# EAGLE board 3x (EAGLE 6.5.0), part 1 of 2
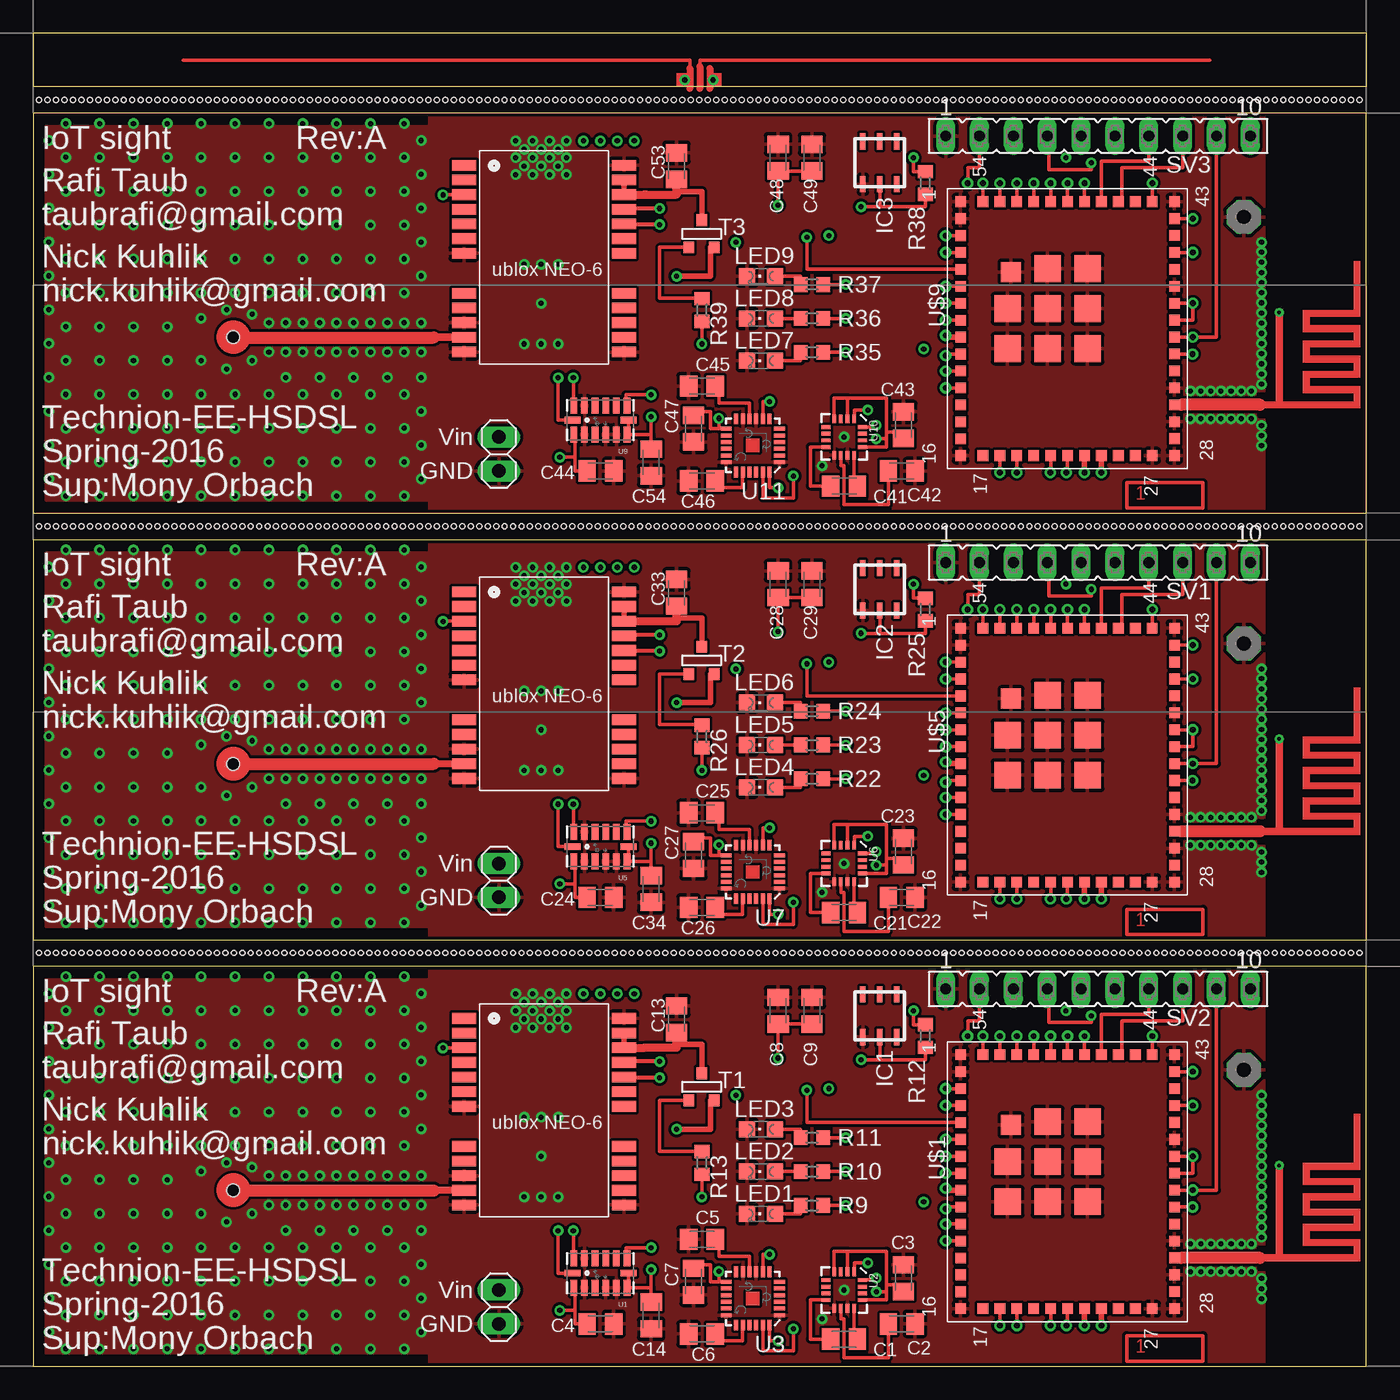
[diagram p0: board, top side]
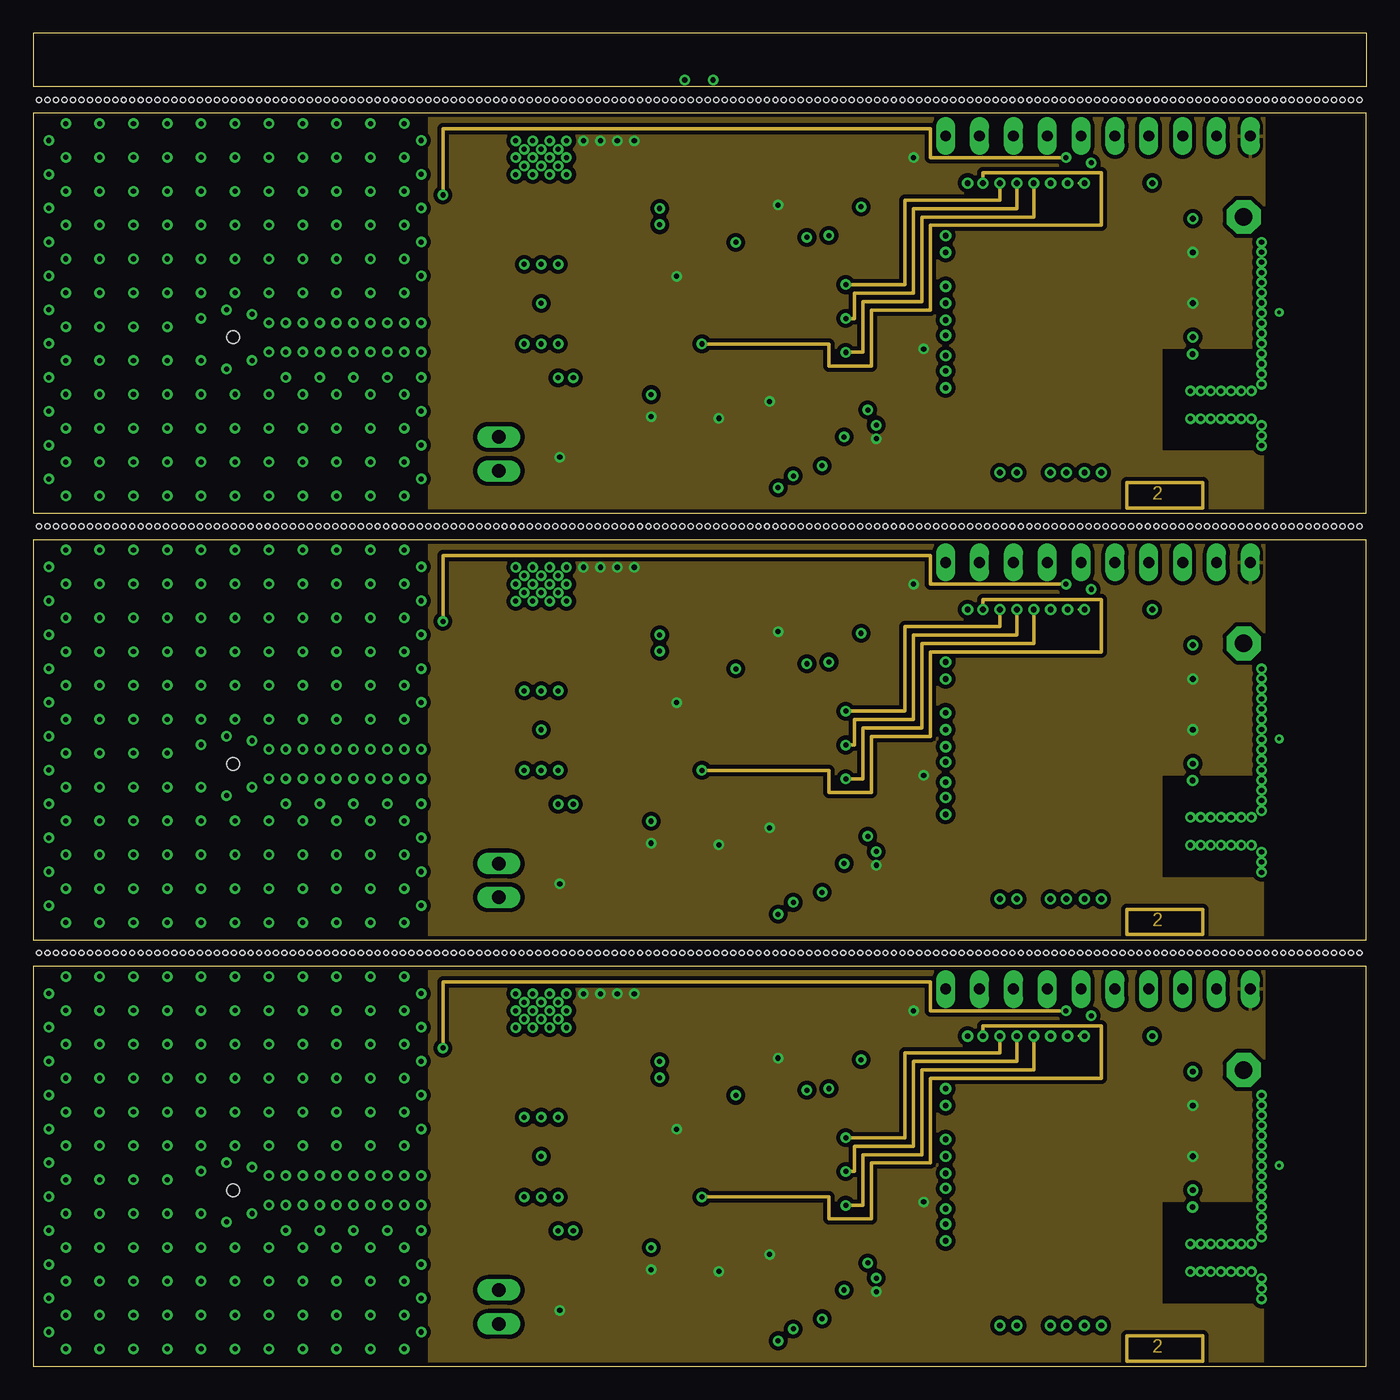
[diagram p1: board, inner layer Route2]
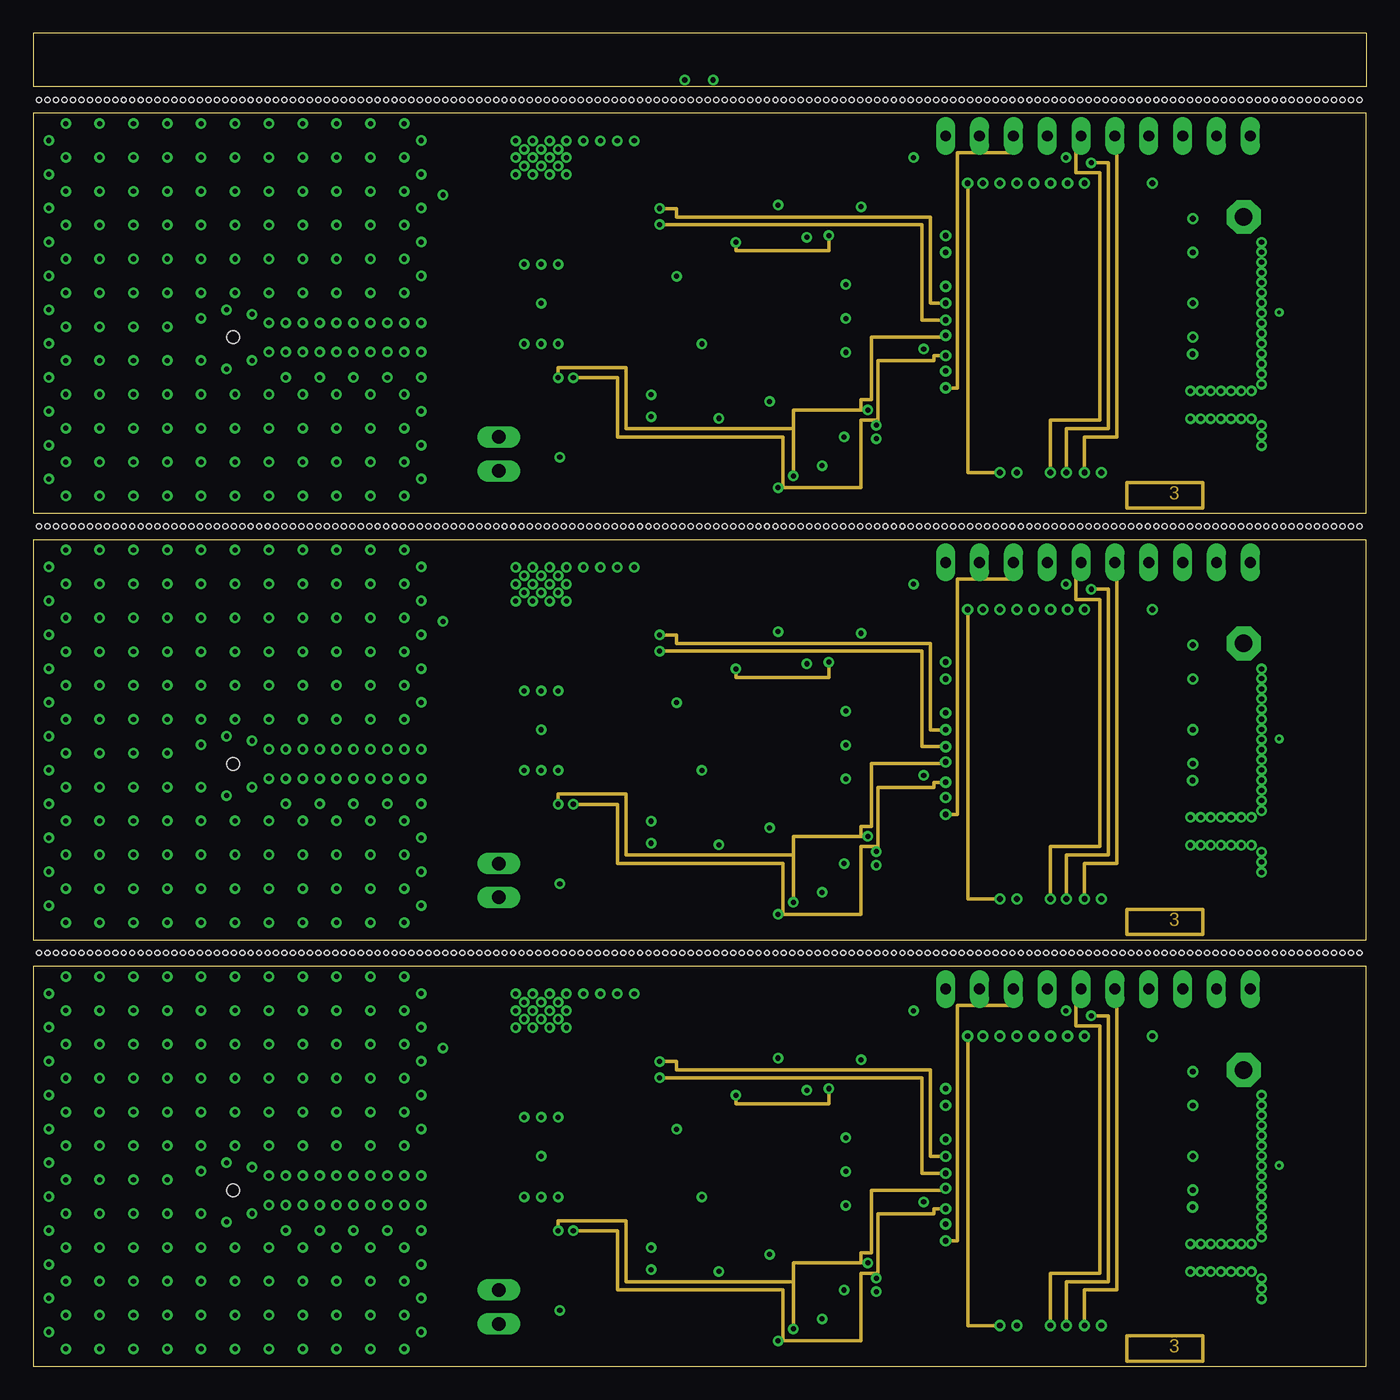
[diagram p2: board, inner layer Route3]
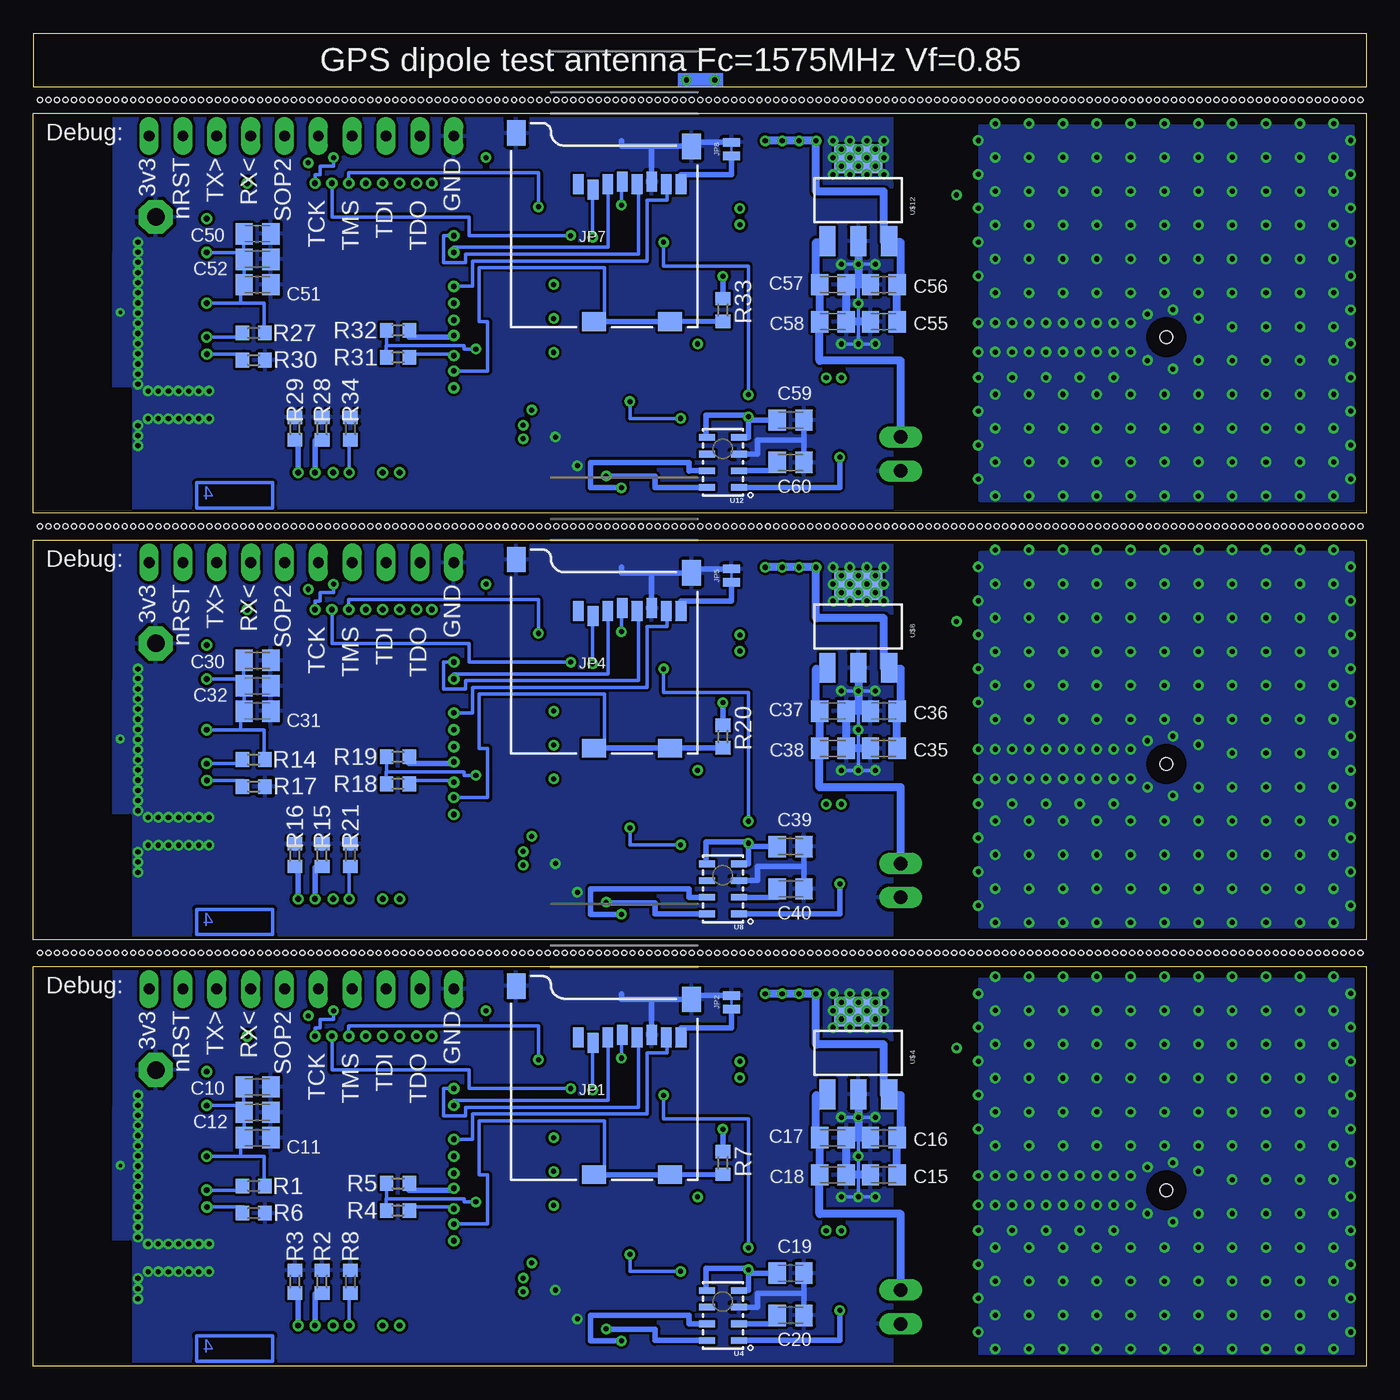
[diagram p3: board, bottom side, seen from below]

Size 100 x 100 mm. Coordinates in mm from the lower left corner, seen from the top.
Outline: 0,0 100,0 100,30 0,30 0,0
Outline: 0,32 100,32 100,62 0,62 0,32
Outline: 0,64 100,64 100,94 0,94 0,64
Outline: 100,96 0,96 0,100 100,100 100,96
Copper layers (1*2*3*16): Top 0.035mm / dielectric 1.5mm / Route2 0.035mm / dielectric 0.15mm / Route3 0.035mm / dielectric 0.2mm / Bottom 0.035mm
Design rules "SparkFun *": minimum track width 1mil, minimum drill 10mil, track to track 8mil, track to pad 8mil, pad to pad 8mil, via to via 8mil, smd to smd 8mil, copper to edge 10mil, drill to drill 8mil, minimum pad ring 12mil, minimum via ring 8mil, stop-mask expansion 4mil, vias tented up to drill 16mil, thermal gap 10mil
Holes 0.95 mm at 15,13.2 15,45.2 15,77.2
Holes 0.38 mm at 6.15,63 5.51,63 4.88,63 4.24,63 3.61,63 6.78,63 7.42,63 2.97,63 2.34,63 1.7,63 1.07,63 0.43,63 13.77,63 13.13,63 12.5,63 11.86,63 11.23,63 14.4,63 15.04,63 10.59,63 9.96,63 9.32,63 8.69,63 8.05,63 21.39,63 20.75,63 20.12,63 19.48,63 18.85,63 22.02,63 22.66,63 18.21,63 17.58,63 16.94,63 16.31,63 15.67,63 29.01,63 28.37,63 27.74,63 27.1,63 26.47,63 29.64,63 30.28,63 25.83,63 25.2,63 24.56,63 23.93,63 23.29,63 36.63,63 35.99,63 35.36,63 34.72,63 34.09,63 37.26,63 37.9,63 33.45,63 32.82,63 32.18,63 31.55,63 30.91,63 44.25,63 43.61,63 42.98,63 42.34,63 41.71,63 44.88,63 45.52,63 41.07,63 40.44,63 39.8,63 39.17,63 38.53,63 51.87,63 51.23,63 50.6,63 49.96,63 49.33,63 52.5,63 53.14,63 48.69,63 48.06,63 47.42,63 46.79,63 46.15,63 59.49,63 58.85,63 58.22,63 57.58,63 56.95,63 60.12,63 60.76,63 56.31,63 55.68,63 55.04,63 54.41,63 53.77,63 67.11,63 66.47,63 65.84,63 65.2,63 64.57,63 67.74,63 68.38,63 63.93,63 63.3,63 62.66,63 62.03,63 61.39,63 74.73,63 74.09,63 73.46,63 72.82,63 72.19,63 75.36,63 76,63 71.55,63 70.92,63 70.28,63 69.65,63 69.01,63 82.35,63 81.71,63 81.08,63 80.44,63 79.81,63 82.98,63 83.62,63 79.17,63 78.54,63 77.9,63 77.27,63 76.63,63 89.97,63 89.33,63 88.7,63 88.06,63 87.43,63 90.6,63 91.24,63 86.79,63 86.16,63 85.52,63 84.89,63 84.25,63 97.59,63 96.95,63 96.32,63 95.68,63 95.05,63 98.22,63 98.86,63 94.41,63 93.78,63 93.14,63 92.51,63 91.87,63 99.49,63 6.15,31 5.51,31 4.88,31 4.24,31 3.61,31 6.78,31 7.42,31 2.97,31 2.34,31 1.7,31 1.07,31 0.43,31 13.77,31 13.13,31 12.5,31 11.86,31 11.23,31 14.4,31 15.04,31 10.59,31 9.96,31 9.32,31 8.69,31 8.05,31 21.39,31 20.75,31 20.12,31 19.48,31 18.85,31 22.02,31 22.66,31 18.21,31 17.58,31 16.94,31 16.31,31 15.67,31 29.01,31 28.37,31 27.74,31 27.1,31 26.47,31 29.64,31 30.28,31 25.83,31 25.2,31 24.56,31 23.93,31 23.29,31 36.63,31 35.99,31 35.36,31 34.72,31 34.09,31 37.26,31 37.9,31 33.45,31 32.82,31 32.18,31 31.55,31 30.91,31 44.25,31 43.61,31 42.98,31 42.34,31 41.71,31 44.88,31 45.52,31 41.07,31 40.44,31 39.8,31 39.17,31 38.53,31 51.87,31 51.23,31 50.6,31 49.96,31 49.33,31 52.5,31 53.14,31 48.69,31 48.06,31 47.42,31 46.79,31 46.15,31 59.49,31 58.85,31 58.22,31 57.58,31 56.95,31 60.12,31 60.76,31 56.31,31 55.68,31 55.04,31 54.41,31 53.77,31 67.11,31 66.47,31 65.84,31 65.2,31 64.57,31 67.74,31 68.38,31 63.93,31 63.3,31 62.66,31 62.03,31 61.39,31 74.73,31 74.09,31 73.46,31 72.82,31 72.19,31 75.36,31 76,31 71.55,31 70.92,31 70.28,31 69.65,31 69.01,31 82.35,31 81.71,31 81.08,31 80.44,31 79.81,31 82.98,31 83.62,31 79.17,31 78.54,31 77.9,31 77.27,31 76.63,31 89.97,31 89.33,31 88.7,31 88.06,31 87.43,31 90.6,31 91.24,31 86.79,31 86.16,31 85.52,31 84.89,31 84.25,31 97.59,31 96.95,31 96.32,31 95.68,31 95.05,31 98.22,31 98.86,31 94.41,31 93.78,31 93.14,31 92.51,31 91.87,31 99.49,31 6.15,95 5.51,95 4.88,95 4.24,95 3.61,95 6.78,95 7.42,95 2.97,95 2.34,95 1.7,95 1.07,95 0.43,95 13.77,95 13.13,95 12.5,95 11.86,95 11.23,95 14.4,95 15.04,95 10.59,95 9.96,95 9.32,95 8.69,95 8.05,95 21.39,95 20.75,95 20.12,95 19.48,95 18.85,95 22.02,95 22.66,95 18.21,95 17.58,95 16.94,95 16.31,95 15.67,95 29.01,95 28.37,95 27.74,95 27.1,95 26.47,95 29.64,95 30.28,95 25.83,95 25.2,95 24.56,95 23.93,95 23.29,95 36.63,95 35.99,95 35.36,95 34.72,95 34.09,95 37.26,95 37.9,95 33.45,95 32.82,95 32.18,95 31.55,95 30.91,95 44.25,95 43.61,95 42.98,95 42.34,95 41.71,95 44.88,95 45.52,95 41.07,95 40.44,95 39.8,95 39.17,95 38.53,95 51.87,95 51.23,95 50.6,95 49.96,95 49.33,95 52.5,95 53.14,95 48.69,95 48.06,95 47.42,95 46.79,95 46.15,95 59.49,95 58.85,95 58.22,95 57.58,95 56.95,95 60.12,95 60.76,95 56.31,95 55.68,95 55.04,95 54.41,95 53.77,95 67.11,95 66.47,95 65.84,95 65.2,95 64.57,95 67.74,95 68.38,95 63.93,95 63.3,95 62.66,95 62.03,95 61.39,95 74.73,95 74.09,95 73.46,95 72.82,95 72.19,95 75.36,95 76,95 71.55,95 70.92,95 70.28,95 69.65,95 69.01,95 82.35,95 81.71,95 81.08,95 80.44,95 79.81,95 82.98,95 83.62,95 79.17,95 78.54,95 77.9,95 77.27,95 76.63,95 89.97,95 89.33,95 88.7,95 88.06,95 87.43,95 90.6,95 91.24,95 86.79,95 86.16,95 85.52,95 84.89,95 84.25,95 97.59,95 96.95,95 96.32,95 95.68,95 95.05,95 98.22,95 98.86,95 94.41,95 93.78,95 93.14,95 92.51,95 91.87,95 99.49,95
tRestrict: area 92.8,4.9 to 100.1,20.6; area 92.8,36.9 to 100.1,52.6; area 92.8,68.9 to 100.1,84.6; 6 lines
bRestrict: area 92.8,0.2 to 97,29.8; area 13.5,11.7 to 16.5,14.7; area 92.8,32.2 to 97,61.8; area 13.5,43.7 to 16.5,46.7; area 92.8,64.2 to 97,93.8; area 13.5,75.7 to 16.5,78.7

## Footprints (pad centres in the part's own frame; a part is rotated, then mirrored left to right if it is on the bottom)
PAD-01 = drill 1.321 pad 2.54 octagon: 1 0,0
C0805K = smd 1.3 x 1.6: 1 -1,0; 2 1,0
TSOC6 = smd 0.406 x 1.219: 1 -1.27,-1.6; 2 0,-1.6; 3 1.27,-1.6; 4 1.27,1.6; 5 0,1.6; 6 -1.27,1.6
MICRO-SD-SOCKET-SDIO = smd 1.8 x 1.4: CD1 11.92,0.4; CD2 6.22,0.4 | smd 0.8 x 1.5: CD/DAT3 6.13,10.3; CLK 9.43,10.7; CMD 7.23,10.7; DAT0 11.63,10.7; DAT1 12.73,10.7; DAT2 5.03,10.7; GND 10.53,10.9; VCC 8.33,10.9 | smd 1.4 x 1.9: GND1 0.37,14.55; GND3 13.52,13.55
PAD-JUMPER-2-NC_BY_TRACE_NO_SILK = smd 0.635 x 1.27: 1 -0.508,0; 2 0.508,0
1X02 = drill 1.016 long: 1 -1.27,0; 2 1.27,0
CHIPLED_0805 = smd 1.2 x 1.2: A 0,-1.05; C 0,1.05
R0603 = smd 1 x 1.1: 1 -0.85,0; 2 0.85,0
FE10 = drill 0.813 long: 1 -11.43,0; 2 -8.89,0; 3 -6.35,0; 4 -3.81,0; 5 -1.27,0; 6 1.27,0; 7 3.81,0; 8 6.35,0; 9 8.89,0; 10 11.43,0
SOT-23 = smd 0.787 x 0.889: 1 0.025,-1.016; 2 -0.94,1.016; 3 0.991,1.016
LGA14 = smd 0.5 x 1.2: 1 2,1.1; 2 1.2,1.1; 3 0.4,1.1; 4 -0.4,1.1; 5 -1.2,1.1; 6 -2,1.1; 8 -2,-1.1; 9 -1.2,-1.1; 10 -0.4,-1.1; 11 0.4,-1.1; 12 1.2,-1.1; 13 2,-1.1 | smd 1.2 x 0.5: 7 -2.1,0; 14 2.1,0
16LPCC = smd 0.65 x 0.28: 1 -1.37,0.75; 2 -1.37,0.25; 3 -1.37,-0.25; 4 -1.37,-0.75; 9 1.37,-0.75; 10 1.37,-0.25; 11 1.37,0.25; 12 1.37,0.75 | smd 0.28 x 0.65: 5 -0.75,-1.37; 6 -0.25,-1.37; 7 0.25,-1.37; 8 0.75,-1.37; 13 0.75,1.37; 14 0.25,1.37; 15 -0.25,1.37; 16 -0.75,1.37
QFN-24 = smd 0.8 x 0.3: 1 -2,1.25; 2 -2,0.75; 3 -2,0.25; 4 -2,-0.25; 5 -2,-0.75; 6 -2,-1.25; 13 2,-1.25; 14 2,-0.75; 15 2,-0.25; 16 2,0.25; 17 2,0.75; 18 2,1.25 | smd 0.3 x 0.8: 7 -1.25,-2; 8 -0.75,-2; 9 -0.25,-2; 10 0.25,-2; 11 0.75,-2; 12 1.25,-2; 19 1.25,2; 20 0.75,2; 21 0.25,2; 22 -0.25,2; 23 -0.75,2; 24 -1.25,2
LGA8 = smd 1.2 x 0.5: 1 -1.2,1.875; 2 -1.2,0.625; 3 -1.2,-0.625; 4 -1.2,-1.875; 5 1.2,-1.875; 6 1.2,-0.625; 7 1.2,0.625; 8 1.2,1.875
CC3200MOD = smd 0.8 x 0.8: P1 9.52,8.025; P2 8.25,8.025; P3 6.98,8.025; P4 5.71,8.025; P5 4.44,8.025; P6 3.17,8.025; P7 1.9,8.025; P8 0.63,8.025; P9 -0.64,8.025; P10 -1.91,8.025; P11 -3.18,8.025; P12 -4.45,8.025; P13 -5.72,8.025; P14 -6.99,8.025; P15 -8.26,8.025; P16 -9.53,8.025; P17 -9.525,6.35; P18 -9.525,5.08; P19 -9.525,3.81; P20 -9.525,2.54; P21 -9.525,1.27; P22 -9.525,0; P23 -9.525,-1.27; P24 -9.525,-2.54; P25 -9.525,-3.81; P26 -9.525,-5.08; P27 -9.525,-6.35; P28 -9.525,-8.02; P29 -8.255,-8.02; P30 -6.985,-8.02; P31 -5.715,-8.02; P32 -4.445,-8.02; P33 -3.175,-8.02; P34 -1.905,-8.02; P35 -0.635,-8.02; P36 0.635,-8.02; P37 1.905,-8.02; P38 3.175,-8.02; P39 4.445,-8.02; P40 5.715,-8.02; P41 6.985,-8.02; P42 8.255,-8.02; P43 9.525,-8.02; P44 9.525,-6.35; P45 9.525,-5.08; P46 9.525,-3.81; P47 9.525,-2.54; P48 9.525,-1.27; P49 9.525,0; P50 9.525,1.27; P51 9.525,2.54; P52 9.525,3.81; P53 9.525,5.08; P54 9.525,6.35 | smd 1.5 x 1.5: P55 4.25,4.25 | smd 2 x 2: P56 1.5,-1.5; P57 -1.5,4.5; P58 4.5,1.5; P59 1.5,1.5; P60 -1.5,1.5; P61 4.5,-1.5; P62 1.5,4.5; P63 -1.5,-1.5
UBLOX_NEO-6P = smd 1.8 x 0.8: 1_RESERVED 6.4,-7.4; 2_SS_N 6.4,-6.3; 3_TIMEPULSE 6.4,-5.2; 4_EXTINT0 6.4,-4.1; 5_USB_DM 6.4,-3; 6_USB_DP 6.4,-1.9; 7_VDDUSB 6.4,-0.8; 8_RESERVED 6.4,2.2; 9_VCC_RF 6.4,3.3; 10_GND 6.4,4.4; 11_RF_IN 6.4,5.5; 12_GND 6.4,6.6; 13_GND -5.6,6.6; 14_MOSI/CFG_COM0 -5.6,5.5; 15_MISO/CFG_COM1 -5.6,4.4; 16_CFG_CPS0/SCK -5.6,3.3; 17_RESERVED -5.6,2.2; 18_SDA2 -5.6,-0.8; 19_SCL2 -5.6,-1.9; 20_TXD1 -5.6,-3; 21_RXD1 -5.6,-4.1; 22_V_BCKP -5.6,-5.2; 23_VCC -5.6,-6.3; 24_GND -5.6,-7.4
SOT223 = smd 1.219 x 2.235: 1 -2.311,-3.099; 2 0,-3.099; 3 2.311,-3.099 | smd 3.6 x 2.2: 4 0,3.099

## Placement (x,y rotation side)
ANT1  ADA18182  [PAD-01]  90.81,22.23 0 top
ANT2  ADA18182  [PAD-01]  90.81,54.23 0 top
ANT3  ADA18182  [PAD-01]  90.81,86.22 0 top
C1  0.22uF  [C0805K]  60.83,2.03 0 top
C2  4.7uf  [C0805K]  65.15,3.17 0 top
C3  0.1uF  [C0805K]  65.28,6.6 90 top
C4  0.1uF  [C0805K]  42.55,3.17 0 top
C5  0.1uF  [C0805K]  50.16,9.53 180 top
C6  2.2nf  [C0805K]  50.16,2.41 180 top
C7  0.1uF  [C0805K]  49.53,6.35 270 top
C8  4.7uf  [C0805K]  55.88,26.67 90 top
C9  0.1uF  [C0805K]  58.42,26.67 90 top
C10  4.7uf  [C0805K]  83.19,20.95 0 bottom
C11  0.1uF  [C0805K]  83.19,17.14 0 bottom
C12  0.01uF  [C0805K]  83.19,19.05 0 bottom
C13  0.1uF  [C0805K]  48.26,26.04 90 top
C14  0.1uF  [C0805K]  46.35,3.81 270 top
C15  4.7uf  [C0805K]  36.2,14.35 180 bottom
C16  0.1uF  [C0805K]  36.2,17.14 180 bottom
C17  4.7uf  [C0805K]  40.01,17.14 0 bottom
C18  0.1uF  [C0805K]  40.01,14.35 0 bottom
C19  1uF  [C0805K]  43.18,6.99 0 bottom
C20  1uF  [C0805K]  43.18,3.81 0 bottom
C21  0.22uF  [C0805K]  60.83,34.03 0 top
C22  4.7uf  [C0805K]  65.15,35.17 0 top
C23  0.1uF  [C0805K]  65.28,38.6 90 top
C24  0.1uF  [C0805K]  42.55,35.17 0 top
C25  0.1uF  [C0805K]  50.16,41.52 180 top
C26  2.2nf  [C0805K]  50.16,34.41 180 top
C27  0.1uF  [C0805K]  49.53,38.35 270 top
C28  4.7uf  [C0805K]  55.88,58.67 90 top
C29  0.1uF  [C0805K]  58.42,58.67 90 top
C30  4.7uf  [C0805K]  83.19,52.95 0 bottom
C31  0.1uF  [C0805K]  83.19,49.15 0 bottom
C32  0.01uF  [C0805K]  83.19,51.05 0 bottom
C33  0.1uF  [C0805K]  48.26,58.03 90 top
C34  0.1uF  [C0805K]  46.35,35.81 270 top
C35  4.7uf  [C0805K]  36.2,46.35 180 bottom
C36  0.1uF  [C0805K]  36.2,49.15 180 bottom
C37  4.7uf  [C0805K]  40.01,49.15 0 bottom
C38  0.1uF  [C0805K]  40.01,46.35 0 bottom
C39  1uF  [C0805K]  43.18,38.98 0 bottom
C40  1uF  [C0805K]  43.18,35.81 0 bottom
C41  0.22uF  [C0805K]  60.83,66.03 0 top
C42  4.7uf  [C0805K]  65.15,67.17 0 top
C43  0.1uF  [C0805K]  65.28,70.6 90 top
C44  0.1uF  [C0805K]  42.55,67.17 0 top
C45  0.1uF  [C0805K]  50.16,73.53 180 top
C46  2.2nf  [C0805K]  50.16,66.41 180 top
C47  0.1uF  [C0805K]  49.53,70.35 270 top
C48  4.7uf  [C0805K]  55.88,90.67 90 top
C49  0.1uF  [C0805K]  58.42,90.67 90 top
C50  4.7uf  [C0805K]  83.19,84.95 0 bottom
C51  0.1uF  [C0805K]  83.19,81.14 0 bottom
C52  0.01uF  [C0805K]  83.19,83.05 0 bottom
C53  0.1uF  [C0805K]  48.26,90.03 90 top
C54  0.1uF  [C0805K]  46.35,67.81 270 top
C55  4.7uf  [C0805K]  36.2,78.35 180 bottom
C56  0.1uF  [C0805K]  36.2,81.14 180 bottom
C57  4.7uf  [C0805K]  40.01,81.14 0 bottom
C58  0.1uF  [C0805K]  40.01,78.35 0 bottom
C59  1uF  [C0805K]  43.18,70.98 0 bottom
C60  1uF  [C0805K]  43.18,67.81 0 bottom
IC1  DS2401P  [TSOC6]  63.5,26.29 0 top
IC2  DS2401P  [TSOC6]  63.5,58.29 0 top
IC3  DS2401P  [TSOC6]  63.5,90.29 0 top
JP1  2908-05WB-MG  [MICRO-SD-SOCKET-SDIO]  64.14,13.97 0 bottom
JP2  JUMPER-PAD-2-NC_BY_TRACENO_SILK  [PAD-JUMPER-2-NC_BY_TRACE_NO_SILK]  47.62,27.3 90 bottom
JP3  [1X02]  34.92,4.45 90 top
JP4  2908-05WB-MG  [MICRO-SD-SOCKET-SDIO]  64.14,45.97 0 bottom
JP5  JUMPER-PAD-2-NC_BY_TRACENO_SILK  [PAD-JUMPER-2-NC_BY_TRACE_NO_SILK]  47.62,59.3 90 bottom
JP6  [1X02]  34.92,36.45 90 top
JP7  2908-05WB-MG  [MICRO-SD-SOCKET-SDIO]  64.14,77.97 0 bottom
JP8  JUMPER-PAD-2-NC_BY_TRACENO_SILK  [PAD-JUMPER-2-NC_BY_TRACE_NO_SILK]  47.62,91.31 90 bottom
JP9  [1X02]  34.92,68.44 90 top
LED1  [CHIPLED_0805]  54.61,11.43 90 top
LED2  [CHIPLED_0805]  54.61,14.61 90 top
LED3  [CHIPLED_0805]  54.61,17.78 90 top
LED4  [CHIPLED_0805]  54.61,43.43 90 top
LED5  [CHIPLED_0805]  54.61,46.6 90 top
LED6  [CHIPLED_0805]  54.61,49.78 90 top
LED7  [CHIPLED_0805]  54.61,75.43 90 top
LED8  [CHIPLED_0805]  54.61,78.61 90 top
LED9  [CHIPLED_0805]  54.61,81.78 90 top
R1  10k  [R0603]  83.46,13.51 0 bottom
R2  2.7k  [R0603]  78.33,6.35 270 bottom
R3  100k  [R0603]  80.37,6.35 270 bottom
R4  2.7k  [R0603]  72.64,11.68 180 bottom
R5  2.7k  [R0603]  72.64,13.72 180 bottom
R6  100k  [R0603]  83.46,11.48 180 bottom
R7  10k  [R0603]  48.26,15.24 90 bottom
R8  100k  [R0603]  76.2,6.35 270 bottom
R9  470R  [R0603]  58.42,12.06 0 top
R10  470R  [R0603]  58.42,14.61 0 top
R11  470R  [R0603]  58.42,17.14 0 top
R12  2.7k  [R0603]  66.93,24.77 90 top
R13  2.7k  [R0603]  50.16,15.24 270 top
R14  10k  [R0603]  83.46,45.51 0 bottom
R15  2.7k  [R0603]  78.33,38.35 270 bottom
R16  100k  [R0603]  80.37,38.35 270 bottom
R17  100k  [R0603]  83.46,43.48 180 bottom
R18  2.7k  [R0603]  72.64,43.68 180 bottom
R19  2.7k  [R0603]  72.64,45.72 180 bottom
R20  10k  [R0603]  48.26,47.24 90 bottom
R21  100k  [R0603]  76.2,38.35 270 bottom
R22  470R  [R0603]  58.42,44.06 0 top
R23  470R  [R0603]  58.42,46.6 0 top
R24  470R  [R0603]  58.42,49.15 0 top
R25  2.7k  [R0603]  66.93,56.77 90 top
R26  2.7k  [R0603]  50.16,47.24 270 top
R27  10k  [R0603]  83.46,77.51 0 bottom
R28  2.7k  [R0603]  78.33,70.35 270 bottom
R29  100k  [R0603]  80.37,70.35 270 bottom
R30  100k  [R0603]  83.46,75.48 180 bottom
R31  2.7k  [R0603]  72.64,75.68 180 bottom
R32  2.7k  [R0603]  72.64,77.72 180 bottom
R33  10k  [R0603]  48.26,79.24 90 bottom
R34  100k  [R0603]  76.2,70.35 270 bottom
R35  470R  [R0603]  58.42,76.06 0 top
R36  470R  [R0603]  58.42,78.61 0 top
R37  470R  [R0603]  58.42,81.14 0 top
R38  2.7k  [R0603]  66.93,88.77 90 top
R39  2.7k  [R0603]  50.16,79.24 270 top
SV1  [FE10]  79.88,60.3 0 top
SV2  [FE10]  79.88,28.3 0 top
SV3  [FE10]  79.88,92.3 0 top
T1  BS250  [SOT-23]  50.16,20.95 180 top
T2  BS250  [SOT-23]  50.16,52.95 180 top
T3  BS250  [SOT-23]  50.16,84.95 180 top
U1  ADXL345  [LGA14]  42.55,6.99 180 top
U2  HMC5883LSMD  [16LPCC]  60.83,5.71 270 top
U3  ITG-3200ORIG  [QFN-24]  53.98,5.08 180 top
U4  MPL115A2  [LGA8]  48.26,3.81 180 bottom
U5  ADXL345  [LGA14]  42.55,38.98 180 top
U6  HMC5883LSMD  [16LPCC]  60.83,37.72 270 top
U7  ITG-3200ORIG  [QFN-24]  53.98,37.08 180 top
U8  MPL115A2  [LGA8]  48.26,35.81 180 bottom
U9  ADXL345  [LGA14]  42.55,70.98 180 top
U10  HMC5883LSMD  [16LPCC]  60.83,69.72 270 top
U11  ITG-3200ORIG  [QFN-24]  53.98,69.08 180 top
U12  MPL115A2  [LGA8]  48.26,67.81 180 bottom
U$1  CC3200MOD  [CC3200MOD]  77.6,13.84 90 top
U$2  UBLOX_NEO-7  [UBLOX_NEO-6P]  38.71,18.7 180 top
U$3  FOUR_LAYER_WARNING  [FOUR_LAYER_WARNING]  0.64,-3.81 0 top  (outside the outline)
U$4  MIC2920A-3.3WS-TR  [SOT223]  38.1,23.5 0 bottom
U$5  CC3200MOD  [CC3200MOD]  77.6,45.84 90 top
U$6  UBLOX_NEO-7  [UBLOX_NEO-6P]  38.71,50.7 180 top
U$7  FOUR_LAYER_WARNING  [FOUR_LAYER_WARNING]  0.64,28.19 0 top
U$8  MIC2920A-3.3WS-TR  [SOT223]  38.1,55.49 0 bottom
U$9  CC3200MOD  [CC3200MOD]  77.6,77.84 90 top
U$10  UBLOX_NEO-7  [UBLOX_NEO-6P]  38.71,82.7 180 top
U$11  FOUR_LAYER_WARNING  [FOUR_LAYER_WARNING]  0.64,60.19 0 top
U$12  MIC2920A-3.3WS-TR  [SOT223]  38.1,87.5 0 bottom

## Library data of the parts
ANT1-ANT3 = discrete
C1-C60 R1-R39 = rcl
IC1-IC3 = maxim; OC_FARNELL: unknown; OC_NEWARK: unknown
JP1 JP4 JP7 = SparkFun-Connectors; PROD_ID: CONN-07820
JP2 JP5 JP8 = SparkFun-Passives
JP3 JP6 JP9 = pinhead
LED1-LED9 = led
SV1-SV3 = con-lsta; OC_FARNELL: unknown; OC_NEWARK: unknown
T1-T3 = zetex; OC_FARNELL: unknown; OC_NEWARK: unknown
U1 U4 U5 U8 U9 U12 = SparkFun-Sensors
U2 U6 U10 = SparkFun-Sensors; PROD_ID: IC-10284
U3 U7 U11 = SparkFun-DigitalIC
U$1 U$5 U$9 = cc3200mod
U$2 U$6 U$10 = Ava
U$3 U$7 U$11 = SparkFun-Aesthetics
U$4 U$8 U$12 = SparkFun-PowerIC

## Nets
ACC_INT1: U1.8 U$1.P49
ACC_INT2: U1.9
ACC_INT3: U5.8 U$5.P49
ACC_INT4: U5.9
ACC_INT5: U9.8 U$9.P49
ACC_INT6: U9.9
ANT: U$1.P31
ANT1: U$5.P31
ANT2: U$9.P31
G_INT: U3.12
G_INT1: U7.12
G_INT2: U11.12
GND: ANT1.1 C2.2 C3.2 C4.2 C5.2 C6.2 C7.2 C8.2 C9.2 C10.2 C11.2 C12.2 C13.2 C14.2 C15.2 C16.2 C17.2 C18.2 C19.2 C20.2 IC1.1 JP1.GND JP1.GND1 JP1.GND3 JP2.2 JP3.1 LED1.C LED2.C LED3.C R2.1 R3.1 R6.1 R8.1 SV2.1 U1.2 U1.4 U1.5 U1.12 U2.9 U2.11 U3.1 U3.9 U3.11 U3.18 U4.3 U$1.P1 U$1.P2 U$1.P16 U$1.P27 U$1.P28 U$1.P30 U$1.P32 U$1.P38 U$1.P43 U$1.P55 U$1.P56 U$1.P57 U$1.P58 U$1.P59 U$1.P60 U$1.P61 U$1.P62 U$1.P63 U$2.7_VDDUSB U$2.10_GND U$2.12_GND U$2.13_GND U$2.24_GND U$4.2
GND1: ANT2.1 C22.2 C23.2 C24.2 C25.2 C26.2 C27.2 C28.2 C29.2 C30.2 C31.2 C32.2 C33.2 C34.2 C35.2 C36.2 C37.2 C38.2 C39.2 C40.2 IC2.1 JP4.GND JP4.GND1 JP4.GND3 JP5.2 JP6.1 LED4.C LED5.C LED6.C R15.1 R16.1 R17.1 R21.1 SV1.1 U5.2 U5.4 U5.5 U5.12 U6.9 U6.11 U7.1 U7.9 U7.11 U7.18 U8.3 U$5.P1 U$5.P2 U$5.P16 U$5.P27 U$5.P28 U$5.P30 U$5.P32 U$5.P38 U$5.P43 U$5.P55 U$5.P56 U$5.P57 U$5.P58 U$5.P59 U$5.P60 U$5.P61 U$5.P62 U$5.P63 U$6.7_VDDUSB U$6.10_GND U$6.12_GND U$6.13_GND U$6.24_GND U$8.2
GND2: ANT3.1 C42.2 C43.2 C44.2 C45.2 C46.2 C47.2 C48.2 C49.2 C50.2 C51.2 C52.2 C53.2 C54.2 C55.2 C56.2 C57.2 C58.2 C59.2 C60.2 IC3.1 JP7.GND JP7.GND1 JP7.GND3 JP8.2 JP9.1 LED7.C LED8.C LED9.C R28.1 R29.1 R30.1 R34.1 SV3.1 U9.2 U9.4 U9.5 U9.12 U10.9 U10.11 U11.1 U11.9 U11.11 U11.18 U12.3 U$9.P1 U$9.P2 U$9.P16 U$9.P27 U$9.P28 U$9.P30 U$9.P32 U$9.P38 U$9.P43 U$9.P55 U$9.P56 U$9.P57 U$9.P58 U$9.P59 U$9.P60 U$9.P61 U$9.P62 U$9.P63 U$10.7_VDDUSB U$10.10_GND U$10.12_GND U$10.13_GND U$10.24_GND U$12.2
GPS_ON: R13.2 U$1.P54
GPS_ON1: R26.2 U$5.P54
GPS_ON2: R39.2 U$9.P54
ID: IC1.2 R12.1 U$1.P50
ID1: IC2.2 R25.1 U$5.P50
ID2: IC3.2 R38.1 U$9.P50
JTAG_TCK: R8.2 SV2.5 U$1.P21
JTAG_TCK1: R21.2 SV1.5 U$5.P21
JTAG_TCK2: R34.2 SV3.5 U$9.P21
JTAG_TDI: SV2.3 U$1.P12
JTAG_TDI1: SV1.3 U$5.P12
JTAG_TDI2: SV3.3 U$9.P12
JTAG_TDO: SV2.2 U$1.P18
JTAG_TDO1: SV1.2 U$5.P18
JTAG_TDO2: SV3.2 U$9.P18
JTAG_TMS: SV2.4 U$1.P22
JTAG_TMS1: SV1.4 U$5.P22
JTAG_TMS2: SV3.4 U$9.P22
LED1: R9.2 U$1.P51
LED2: R10.2 U$1.P52
LED3: R11.2 U$1.P53
LED4: R22.2 U$5.P51
LED5: R23.2 U$5.P52
LED6: R24.2 U$5.P53
LED7: R35.2 U$9.P51
LED8: R36.2 U$9.P52
LED9: R37.2 U$9.P53
MAG_DRDY: U2.15
MAG_DRDY1: U6.15
MAG_DRDY2: U10.15
N$1: U$1.P19
N$7: JP1.DAT1 JP2.1
N$8: C1.2 U2.12
N$9: C1.1 U2.8
N$10: C2.1 U2.10
N$11: LED1.A R9.1
N$12: LED2.A R10.1
N$13: C5.1 U3.10
N$14: LED3.A R11.1
N$15: C6.1 U3.20
N$17: C17.1 C18.1 JP3.2 U$4.1
N$18: C13.1 T1.1 U$2.22_V_BCKP U$2.23_VCC
N$19: U$1.P42
N$20: R13.1 T1.3
N$22: U$1.P44
N$23: C20.1 U4.2
N$26: C21.2 U6.12
N$27: C21.1 U6.8
N$28: C22.1 U6.10
N$29: C25.1 U7.10
N$30: C26.1 U7.20
N$31: JP4.DAT1 JP5.1
N$32: LED4.A R22.1
N$33: LED5.A R23.1
N$34: LED6.A R24.1
N$36: U$5.P19
N$37: U$5.P42
N$38: U$5.P44
N$39: C37.1 C38.1 JP6.2 U$8.1
N$40: C33.1 T2.1 U$6.22_V_BCKP U$6.23_VCC
N$41: R26.1 T2.3
N$42: C40.1 U8.2
N$47: C41.2 U10.12
N$48: C41.1 U10.8
N$49: C42.1 U10.10
N$50: C45.1 U11.10
N$51: C46.1 U11.20
N$52: JP7.DAT1 JP8.1
N$53: LED7.A R35.1
N$54: LED8.A R36.1
N$55: LED9.A R37.1
N$57: U$9.P19
N$58: U$9.P42
N$59: U$9.P44
N$60: C57.1 C58.1 JP9.2 U$12.1
N$61: C53.1 T3.1 U$10.22_V_BCKP U$10.23_VCC
N$62: R39.1 T3.3
N$63: C60.1 U12.2
NRST: R1.1 SV2.9 U$1.P35
NRST1: R14.1 SV1.9 U$5.P35
NRST2: R27.1 SV3.9 U$9.P35
RX1: U$1.P8 U$2.20_TXD1
RX2: U$5.P8 U$6.20_TXD1
RX3: U$9.P8 U$10.20_TXD1
RXD: SV2.7 U$1.P47
RXD1: SV1.7 U$5.P47
RXD2: SV3.7 U$9.P47
SCL: R5.1 U1.14 U2.1 U3.23 U4.8 U$1.P9
SCL1: R19.1 U5.14 U6.1 U7.23 U8.8 U$5.P9
SCL2: R32.1 U9.14 U10.1 U11.23 U12.8 U$9.P9
SD_CARD_DET: JP1.CD1 JP1.CD2 R7.1 U$1.P11
SD_CARD_DET1: JP4.CD1 JP4.CD2 R20.1 U$5.P11
SD_CARD_DET2: JP7.CD1 JP7.CD2 R33.1 U$9.P11
SD_CLK: JP1.CLK U$1.P3
SD_CLK1: JP4.CLK U$5.P3
SD_CLK2: JP7.CLK U$9.P3
SD_CMD: JP1.CMD U$1.P4
SD_CMD1: JP4.CMD U$5.P4
SD_CMD2: JP7.CMD U$9.P4
SD_CS: JP1.CD/DAT3 U$1.P5
SD_CS1: JP4.CD/DAT3 U$5.P5
SD_CS2: JP7.CD/DAT3 U$9.P5
SD_DATA0: JP1.DAT0 U$1.P6
SD_DATA1: JP4.DAT0 U$5.P6
SD_DATA2: JP7.DAT0 U$9.P6
SDA: R4.1 U1.13 U2.16 U3.24 U4.7 U$1.P10
SDA1: R18.1 U5.13 U6.16 U7.24 U8.7 U$5.P10
SDA2: R31.1 U9.13 U10.16 U11.24 U12.7 U$9.P10
SOP0: R6.2 U$1.P34
SOP1: R3.2 U$1.P24
SOP2: R2.2 SV2.6 U$1.P23
SOP3: R17.2 U$5.P34
SOP4: R16.2 U$5.P24
SOP5: R15.2 SV1.6 U$5.P23
SOP6: R30.2 U$9.P34
SOP7: R29.2 U$9.P24
SOP8: R28.2 SV3.6 U$9.P23
TIMEPULSE: U$1.P48 U$2.3_TIMEPULSE
TIMEPULSE1: U$5.P48 U$6.3_TIMEPULSE
TIMEPULSE2: U$9.P48 U$10.3_TIMEPULSE
TX1: U$1.P7 U$2.21_RXD1
TX2: U$5.P7 U$6.21_RXD1
TX3: U$9.P7 U$10.21_RXD1
TXD: SV2.8 U$1.P46
TXD1: SV1.8 U$5.P46
TXD2: SV3.8 U$9.P46
VDD: C3.1 C4.1 C7.1 C8.1 C9.1 C10.1 C11.1 C12.1 C14.1 C15.1 C16.1 C19.1 JP1.VCC R1.2 R4.2 R5.2 R7.2 R12.2 SV2.10 T1.2 U1.1 U1.6 U1.7 U2.2 U2.4 U2.13 U3.8 U3.13 U4.1 U4.4 U4.5 U$1.P36 U$1.P37 U$1.P40 U$4.3
VDD1: C23.1 C24.1 C27.1 C28.1 C29.1 C30.1 C31.1 C32.1 C34.1 C35.1 C36.1 C39.1 JP4.VCC R14.2 R18.2 R19.2 R20.2 R25.2 SV1.10 T2.2 U5.1 U5.6 U5.7 U6.2 U6.4 U6.13 U7.8 U7.13 U8.1 U8.4 U8.5 U$5.P36 U$5.P37 U$5.P40 U$8.3
VDD2: C43.1 C44.1 C47.1 C48.1 C49.1 C50.1 C51.1 C52.1 C54.1 C55.1 C56.1 C59.1 JP7.VCC R27.2 R31.2 R32.2 R33.2 R38.2 SV3.10 T3.2 U9.1 U9.6 U9.7 U10.2 U10.4 U10.13 U11.8 U11.13 U12.1 U12.4 U12.5 U$9.P36 U$9.P37 U$9.P40 U$12.3